# Altium PCB PCB1.PcbDoc
Units mm, origin at the board's own origin, x right, y up, seen from the top; angles counter-clockwise.
Board outline 30.48 x 19.05 mm, 2 copper layers (L1, L2); 9 components, 9 nets, 27 pads, 0 vias.
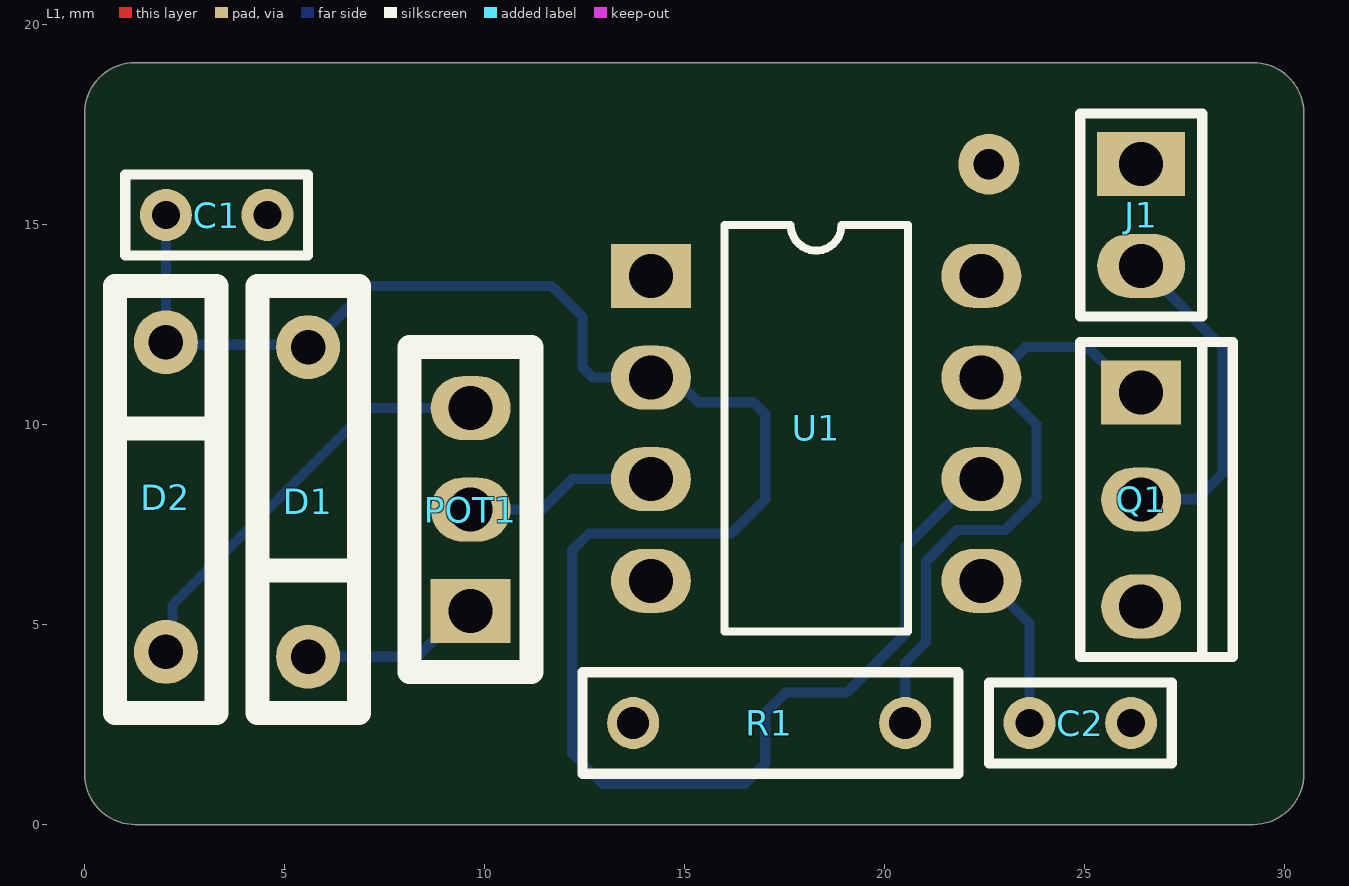
[diagram p0: L1 view]
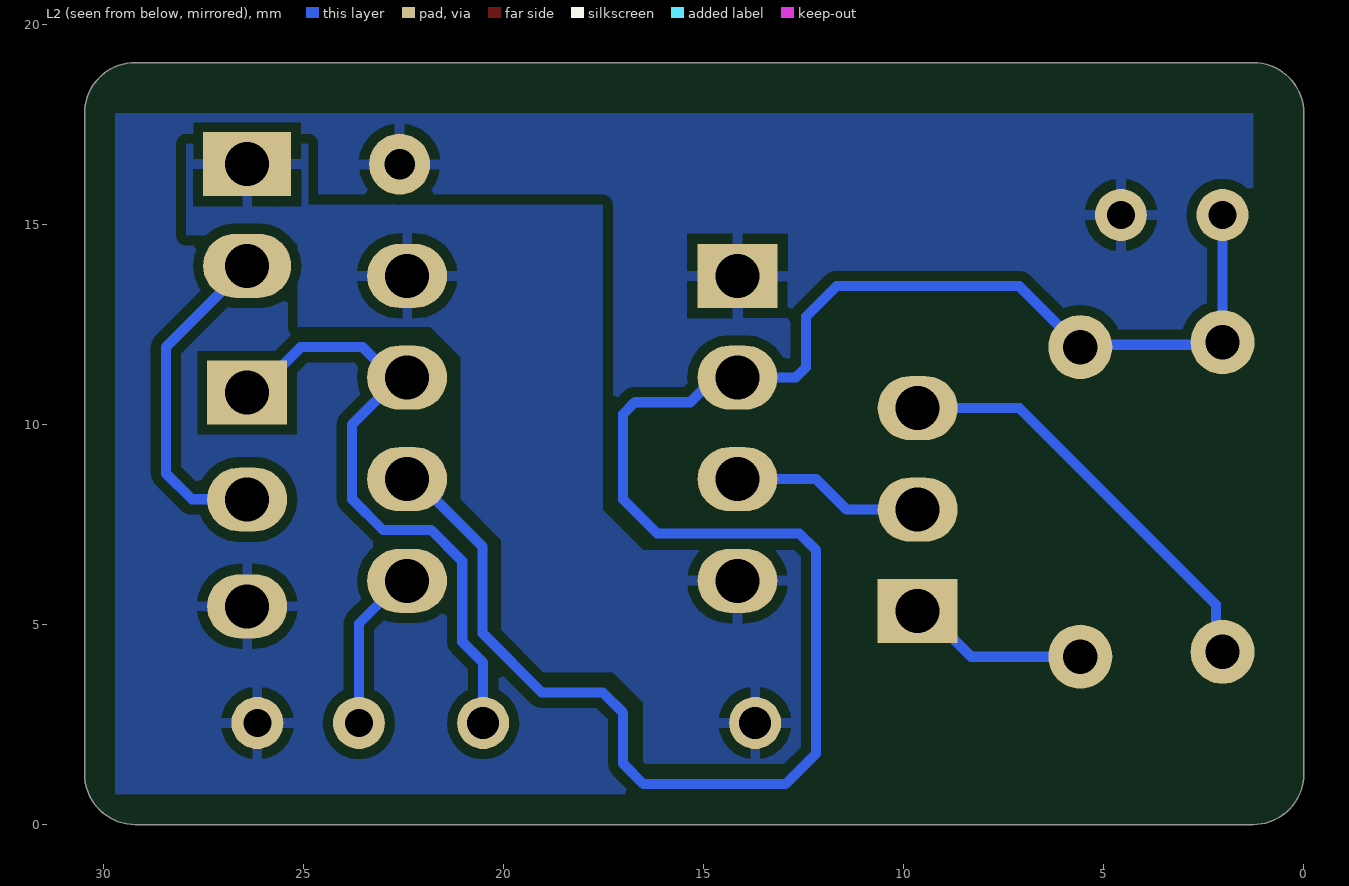
[diagram p1: L2 view, seen from below]

## Layer stack, top to bottom
Top Solder: solder mask 0.0102, Solder Resist, Dk 3.5
L1: signal copper 0.0356
Dielectric 1: dielectric 0.32, FR-4, Dk 4.8
L2: signal copper 0.0356
Bottom Solder: solder mask 0.0102, Solder Resist, Dk 3.5

## Board outline
1.27,19.05 ccw(c1.27,17.78) 0,17.78 0,17.062 0,16.764 0,1.27 ccw(c1.27,1.27) 1.27,0 29.21,0 ccw(c29.21,1.27) 30.48,1.27 30.48,17.78 ccw(c29.21,17.78) 29.21,19.05 28.702,19.05 2.54,19.05 2.322,19.05

## Design rules (kind name [scope] priority, off if disabled: settings)
Clearance [All] p1: gap=0.254 ignorepadtopadclearanceinfootprint=FALSE except(0: Arc-Hole Track-Hole SMDPad-Hole THPad-Hole Via-Hole Fill-Hole Poly-Hole Region-Hole Text-Hole)
PolygonConnect [All] p1: connectstyle=Relief reliefconductorwidth=0.254 reliefentries=4 polygonreliefangle="90 Angle" airgapwidth=0.254
RoutingVias [All] p1: holewidth=0.711 width=1.27 viastyle="Through Hole" minholewidth=0.711 minwidth=1.27 maxholewidth=0.711 maxwidth=1.27
SolderMaskExpansion [All] p1: expansion=0.102 istentingtop=FALSE
Width [All] p1: maxlimit=0.254 minlimit=0.254 preferedwidth=0.254
30 further rules are at their usual default settings.

## Components (designator, comment, footprint, x,y, rotation, side; value= is the part's Value field where it differs from the comment)
C1 "100nF" CAP 4.572,15.24 r180 top
C2 "100PF" CAP 26.162,2.54 r180 top
D1 "1N5819" DIODE1N5819 5.588,11.938 r270 top
D2 "1N5819" DIODE1N5819 2.032,4.318 r90 top
J1 "HDR" HDR1X2 26.416,16.51 r0 top
POT1 "100K" POT 9.652,5.334 r180 top
Q1 "IRF540" TO-220 26.416,10.798 r0 top
R1 "10K" TH_L6.8 13.716,2.54 r0 top
U1 "NE555P" DIP8 18.288,9.906 r0 top

## Footprints (in the part's own frame and the unit in brackets; to place one, negate y for a bottom-side part, rotate by r counter-clockwise, add the part's x,y. Pads: shape width x height; smd on the part's side, far side on the other; paste and mask are expansions set on the pad)
CAP [mm]
  round 1.3 hole 0.7: 1(0,0) 2(2.54,0)
  silkscreen extent -1.02,-1.02 3.56,1.02
DIODE1N5819 [mm]
  round 1.6 hole 0.86: 1(0,0) 2(7.74,0)
  silkscreen extent -1.52,-1.27 9.14,1.27
DIP8 [mm]
  rect 2x1.6 hole 1.1: 1(-4.13,3.81)
  oval 2x1.6 hole 1.1: 2(-4.13,1.27) 3(-4.13,-1.27) 4(-4.13,-3.81) 5(4.13,-3.81) 6(4.13,-1.27) 7(4.13,1.27) 8(4.13,3.81)
  silkscreen extent -2.29,-5.08 2.3,5.08, body extent -3.94,-4.64 3.93,4.63, height 5.84
HDR1X2 [mm]
  rect 2.2x1.6 hole 1.1: 1(0,0)
  oval 2.2x1.6 hole 1.1: 2(0,-2.54)
  silkscreen extent -1.52,-3.81 1.52,1.27
POT [mm]
  rect 2x1.6 hole 1.1: 1(0,0)
  oval 2x1.6 hole 1.1: 2(0,-5.08) 3(0,-2.54)
  silkscreen extent -1.52,-6.6 1.52,1.52
TH_L6.8 [mm]
  round 1.3 hole 0.8: 1(0,0) 2(6.8,0)
  silkscreen extent -1.27,-1.27 8.13,1.27
TO-220 [mm]
  rect 2x1.6 hole 1.1: 1(0,0)
  oval 2x1.6 hole 1.1: 2(0,-2.67) 3(0,-5.34)
  silkscreen extent -1.52,-6.6 2.29,1.27

## Part data
C1: library part RCER71E104K0K1H03B, "Cap Ceramic Monolithic 0.1uF 25VDC 10% Thru-Hole Bulk", Manufacturer=Murata, Supplier Part Number 1=81-RCER71E104K0K1H3B, ComponentLink1Description=http://datasheet.octopart.com/RCER71E104K0K1H03B-Murata-datasheet-138760971.pdf?src-supplier=Ciiva+Crawler, ComponentLink1URL=http://datasheet.octopart.com/RCER71E104K0K1H03B-Murata-datasheet-138760971.pdf?src-supplier=Ciiva+Crawler, ComponentLink2Description=http://datasheet.octopart.com/RCER71E104K0K1H03B-Murata-datasheet-140720004.pdf?src-supplier=Ciiva+Crawler, ComponentLink2URL=http://datasheet.octopart.com/RCER71E104K0K1H03B-Murata-datasheet-140720004.pdf?src-supplier=Ciiva+Crawler, Manufacturer Part Number=RCER71E104K0K1H03B, Pricing 1="1=0.32000, 10=0.15600, 100=0.11100, 500=0.10000, 1000=0.08500, 2500=0.07700 (USD)", Stock 1=894, Supplier 1=Mouser
C2: library part C315C101F3G5TA, Manufacturer=KEMET, Supplier Part Number 1=80-C315C101F3G5TA, Manufacturer Part Number=C315C101F3G5TA, Pricing 1="1=1.10000, 10=0.88000, 50=0.76000, 100=0.66000, 250=0.58000, 500=0.48100 (USD)", RoHS=No, Stock 1=415, Supplier 1=Mouser
D1 D2: "1N58 Series 600 mV 1 A 40 V Max Reverse Voltage Schottky Barrier Rectifier-DO-41", Average Rectified Current=1A, Capacitance=110pF, Forward Voltage=900mV, Manufacturer="ON Semiconductor / Fairchild", Max Forward Surge Current (Ifsm)=25A, Max Operating Temperature=125°C, Max Repetitive Reverse Voltage (Vrrm)=40V, Max Reverse Leakage Current=1mA, Min Operating Temperature=-65°C, Package Quantity=5000, Peak Reverse Current=500uA, Supplier Part Number 1=512-1N5819, Category="Schottky Diodes", ComponentLink1Description=https://datasheet.ciiva.com/4719/1n5817-d-103200-4719059.pdf?src-supplier=Mouser, ComponentLink1URL=https://datasheet.ciiva.com/4719/1n5817-d-103200-4719059.pdf?src-supplier=Mouser, ComponentLink2Description=https://datasheet.ciiva.com/34302/1200637-34302074.pdf?src-supplier=Jameco, ComponentLink2URL=https://datasheet.ciiva.com/34302/1200637-34302074.pdf?src-supplier=Jameco, ComponentLink3Description=https://datasheet.ciiva.com/22651/1671052-22651942.pdf?src-supplier=Element14, ComponentLink3URL=https://datasheet.ciiva.com/22651/1671052-22651942.pdf?src-supplier=Element14, ComponentLink4Description=https://datasheet.ciiva.com/25951/1n5819-25951350.pdf?src-supplier=Avnet+Europe, ComponentLink4URL=https://datasheet.ciiva.com/25951/1n5819-25951350.pdf?src-supplier=Avnet+Europe, ComponentLink5Description=https://datasheet.ciiva.com/8300/1n5819-8300426.pdf?src-supplier=Avnet, ComponentLink5URL=https://datasheet.ciiva.com/8300/1n5819-8300426.pdf?src-supplier=Avnet, ComponentLink6Description=https://datasheet.ciiva.com/1177/1671052-1177084.pdf?src-supplier=Element14, ComponentLink6URL=https://datasheet.ciiva.com/1177/1671052-1177084.pdf?src-supplier=Element14, Contact Plating=Tin,Matte, Current Rating=1A, Diameter=2.72mm, Element Configuration=Single, Forward Current=1A, Height=2.7mm, Lead Free="Lead Free", Length=5.2mm, Manufacturer Part Number=1N5819, Max Reverse Voltage (DC)=40V, Max Surge Current=25A, Mount="Through Hole", Number of Pins=2, Output Current=1A, Packaging="Tape and Reel", Peak Non-Repetitive Surge Current=25A, Polarity=Standard, Pricing 1="1=0.39000, 10=0.26400, 100=0.12300, 1000=0.09600, 5000=0.08300, 10000=0.07400 (USD)", Radiation Hardening=No, REACH SVHC="No SVHC", RoHS=Yes, Stock 1=7162, Supplier 1=Mouser, Voltage Rating (DC)=40V, Weight=0.245g, Width=2.7mm
J1: library part HDR1X2
POT1: library part PDB12-M4251-104BF, "Potentiometers 100K LINEAR 12MM", Manufacturer=Bourns, Max Operating Temperature=50°C, Max Power Dissipation=80mW, Min Operating Temperature=-10°C, Package Quantity=100, Resistance=100kR, Supplier Part Number 1=652-PDB12-M4251104BF, Tolerance=20%, Actuator Diameter=0.236inch, Actuator Length=0.984inch, Category="Variable Resistors and Potentiometers", ComponentLink1Description=https://datasheet.ciiva.com/6249/pdb12-6249595.pdf?src-supplier=Digi-Key, ComponentLink1URL=https://datasheet.ciiva.com/6249/pdb12-6249595.pdf?src-supplier=Digi-Key, Composition=Carbon, Depth=12.8mm, Length=12.8mm, Manufacturer Part Number=PDB12-M4251-104BF, Military Standard=Not, Mount="Through Hole,Brackets", Number of Gangs=1, Number of Turns=1, Packaging=Bulk, Power Rating=80mW, Pricing 1="1=1.01000, 10=0.77000, 100=0.70000, 500=0.59000, 1000=0.55000, 2500=0.48000 (USD)", Radiation Hardening=No, RoHS=Yes, Stock 1=220, Supplier 1=Mouser, Taper=Linear, Termination=Pin, Type=Potentiometer
Q1: "MOSFET N-CH 100V 28A TO-220AB", Case/Package=TO-220-3, Continuous Drain Current (ID)=28A, Drain to Source Breakdown Voltage=100V, Drain to Source Resistance=77mR, Gate to Source Voltage (Vgs)=20V, Input Capacitance=1.7nF, Manufacturer="Vishay Siliconix", Max Operating Temperature=175°C, Max Power Dissipation=150W, Min Operating Temperature=-55°C, Package Quantity=1000, Supplier Part Number 1=844-IRF540, Category=MOSFETs, ComponentLink1Description=https://datasheet.ciiva.com/8114/91021-8114330.pdf?src-supplier=Avnet, ComponentLink1URL=https://datasheet.ciiva.com/8114/91021-8114330.pdf?src-supplier=Avnet, Current=28A, Current Rating=28A, Drain to Source Voltage (Vdss)=100V, Element Configuration=Single, Fall Time=43ns, Height=9.01mm, Lead Free="Contains Lead", Length=10.51mm, Manufacturer Part Number=IRF540, Mount="Through Hole", Number of Channels=1, Number of Elements=1, Number of Pins=3, Packaging=Rail/Tube, Power Dissipation=150W, Rds On Max=77mR, Rise Time=44ns, RoHS=Yes, Supplier 1=Mouser, Turn-Off Delay Time=53ns, Turn-On Delay Time=11ns, Voltage=100V, Voltage Rating (DC)=100V, Weight=0.211644oz, Width=4.7mm
R1: library part CFR-25SJT-52-10K, "Res Carbon Film 10K Ohm 5% 0.25W(1/4W) -500ppm/C to 350ppm/C Conformal Coated AXL Ammo Pack", Case/Package=Conformal, Manufacturer=Yageo, Max Operating Temperature=155°C, Min Operating Temperature=-55°C, Resistance=10kR, Supplier Part Number 1=603-CFR25SJT-52-10K, Temperature Coefficient=350ppm/°C, Tolerance=5%, Category="Through-Hole Resistors", ComponentLink1Description=http://components.arrow.com/part/dataview/0323_00776785?src-supplier=Arrow+Europe, ComponentLink1URL=http://components.arrow.com/part/dataview/0323_00776785?src-supplier=Arrow+Europe, ComponentLink2Description=http://www.yageo.com/documents/recent/Leaded-R_CFR_2011.pdf?src-supplier=Avnet+Europe, ComponentLink2URL=http://www.yageo.com/documents/recent/Leaded-R_CFR_2011.pdf?src-supplier=Avnet+Europe, ComponentLink3Description=http://www.yageo.com/documents/recent/Yageo%20LR_CFR_2013.pdf?src-supplier=Avnet, ComponentLink3URL=http://www.yageo.com/documents/recent/Yageo%20LR_CFR_2013.pdf?src-supplier=Avnet, ComponentLink4Description=http://www.yageo.com/documents/recent/Leaded-R_CFR_2011.pdf?src-supplier=Avnet, ComponentLink4URL=http://www.yageo.com/documents/recent/Leaded-R_CFR_2011.pdf?src-supplier=Avnet, Composition="Carbon Film", Contact Plating=Tin,Matte, Diameter=2.4mm, Length=6.3mm, Manufacturer Part Number=CFR-25SJT-52-10K, Military Standard=Not, Mount="Through Hole", Packaging="Ammo Pack", Pricing 1="1=0.10000, 10=0.04300, 100=0.01500, 1000=0.01100, 5000=0.00800, 10000=0.00700 (USD)", Radiation Hardening=No, RoHS=Yes, Stock 1=2722, Supplier 1=Mouser, Termination=Axial
U1: "Standard Timer Single 8-Pin PDIP Tube", Case/Package=PDIP, Current Rating=10mA, Frequency=500kHz, High Level Output Current=-200mA, Low Level Output Current=200mA, Manufacturer="Texas Instruments", Max Operating Temperature=70°C, Max Supply Voltage=16V, Min Operating Temperature=0°C, Min Supply Voltage=4.5V, Nominal Supply Current=2mA, Operating Supply Voltage=5V, Package Quantity=50, Quiescent Current=15mA, Supplier Part Number 1=296-NE555P-ND, Category="Clock and Timing", ComponentLink1Description=https://datasheet.ciiva.com/1139/sa555-1139904.pdf?src-supplier=Element14, ComponentLink1URL=https://datasheet.ciiva.com/1139/sa555-1139904.pdf?src-supplier=Element14, ComponentLink2Description=https://datasheet.ciiva.com/19457/904085-19457361.pdf?src-supplier=Jameco, ComponentLink2URL=https://datasheet.ciiva.com/19457/904085-19457361.pdf?src-supplier=Jameco, ComponentLink3Description=https://datasheet.ciiva.com/26325/152184-da-01-en-ne555p-timer-tid-26325915.pdf?src-supplier=Conrad, ComponentLink3URL=https://datasheet.ciiva.com/26325/152184-da-01-en-ne555p-timer-tid-26325915.pdf?src-supplier=Conrad, ComponentLink4Description=https://datasheet.ciiva.com/1147/1764032-1147750.pdf?src-supplier=Newark, ComponentLink4URL=https://datasheet.ciiva.com/1147/1764032-1147750.pdf?src-supplier=Newark, ComponentLink5Description=https://datasheet.ciiva.com/14094/ne555-series-eng-tds-14094950.pdf?src-supplier=Distrelec, ComponentLink5URL=https://datasheet.ciiva.com/14094/ne555-series-eng-tds-14094950.pdf?src-supplier=Distrelec, ComponentLink6Description=https://datasheet.ciiva.com/14274/ne555-14274456.pdf?src-supplier=Avnet, ComponentLink6URL=https://datasheet.ciiva.com/14274/ne555-14274456.pdf?src-supplier=Avnet, ComponentLink7Description=https://datasheet.ciiva.com/15152/getdatasheetpartid-248510-15152620.pdf?src-supplier=Verical, ComponentLink7URL=https://datasheet.ciiva.com/15152/getdatasheetpartid-248510-15152620.pdf?src-supplier=Verical, ComponentLink8Description=https://datasheet.ciiva.com/26228/ne555-26228892.pdf?src-supplier=Avnet+Europe, ComponentLink8URL=https://datasheet.ciiva.com/26228/ne555-26228892.pdf?src-supplier=Avnet+Europe, ComponentLink9Description=https://datasheet.ciiva.com/1233/ne555-1233454.pdf?src-supplier=Digi-Key, ComponentLink9URL=https://datasheet.ciiva.com/1233/ne555-1233454.pdf?src-supplier=Digi-Key, Contact Plating=Gold, Height=4.57mm, Lead Free="Lead Free", Length=9.81mm, Manufacturer Part Number=NE555P, Mount="Through Hole", Number of Pins=8, Number of Timers/Counters=1, Operating Supply Current=10mA, Packaging=Rail/Tube, Pricing 1="1=0.45000, 10=0.34200, 25=0.30800, 100=0.21280, 250=0.17920, 500=0.14560, 1000=0.11200, 2500=0.10080, 5000=0.09520 (USD)", Radiation Hardening=No, REACH SVHC="No SVHC", RoHS=Yes, Stock 1=20716, Supplier 1=Digi-Key, Weight=0.015535oz, Width=6.35mm

## Free pads (board coordinates)
  round 1.524 hole 0.762: 1(22.606,16.51)

## Nets (pads, with @x,y where several pads share a name; then routed paths per layer and width w, separated by ;. In a path a pad name is that pad's centre, name@x,y a point inside that pad or via, vN(x,y) a via of type N, cw(c..) or ccw(c..) an arc to the next point about the centre after c; other vN are vias at no path point)
+12: J1.1 R1.1 U1.4 U1.8 | length 1.6
  L2 w0.254: R1.1 R1.1@13.716,2.823 ; U1.8@22.218,13.716 U1.8 U1.8@22.618,13.716 ; J1.1@25.743,15.837 J1.1
GND: C1.1 C2.1 pad.1 Q1.3 U1.1 | length 1.9
  L2 w0.254: U1.1@13.958,13.716 U1.1 14.313,13.716 U1.1@14.986,14.389 ; C2.1 C2.1@26.289,2.667 ; Q1.3@26.289,5.331 Q1.3 Q1.3@26.616,5.458
NetC1_2: C1.2 D1.1 D2.2 U1.2 U1.6 | length 49.2
  L2 w0.254: C1.2 D2.2 2.092,11.998 5.528,11.998 D1.1 7.112,13.462 11.684,13.462 12.446,12.7 12.446,11.43 12.7,11.176 U1.2 14.722,11.176 15.339,10.559 16.724,10.559 17.018,10.265 17.018,8.128 16.167,7.277 12.611,7.277 12.192,6.858 12.192,1.778 12.954,1.016 16.51,1.016 17.018,1.524 17.018,2.794 17.526,3.302 19.05,3.302 20.529,4.781 20.529,6.947 22.218,8.636 U1.6
NetC2_2: C2.2 U1.5 | length 4.1
  L2 w0.254: U1.5 22.556,6.096 23.622,5.03 C2.2
NetD1_2: D1.2 POT1.1 | length 4.5
  L2 w0.254: D1.2 8.316,4.198 9.452,5.334 POT1.1
NetD2_1: D2.1 POT1.2 | length 10.7
  L2 w0.254: D2.1 2.197,4.483 2.197,5.499 7.112,10.414 POT1.2
NetJ1_2: J1.2 Q1.2 | length 8.3
  L2 w0.254: Q1.2 26.422,8.134 27.797,8.134 28.448,8.785 28.448,11.938 J1.2
NetPOT1_3: POT1.3 U1.3 | length 4.8
  L2 w0.254: POT1.3 11.43,7.874 12.192,8.636 U1.3
NetQ1_1: Q1.1 R1.2 U1.7 | length 16
  L2 w0.254: R1.2 20.516,4.05 21.037,4.571 21.037,6.585 21.818,7.366 23.018,7.366 23.799,8.147 23.799,9.995 U1.7@22.618,11.176 ; U1.7 U1.7@22.618,11.176 ; Q1.1 26.216,10.798 25.076,11.938 23.526,11.938 22.764,11.176 U1.7@22.618,11.176

## Polygon pours and split planes (outlines as drawn)
GND on L2 "GND_L02_P001" (solid, remove dead copper, pour order 1): 1.27,17.78 1.27,0.762 29.718,0.762 29.718,17.78
+12 on L2 "+12_L02_P000" (solid, remove dead copper, pour order 0): 12.954,1.524 12.446,2.032 12.446,6.604 12.7,6.858 16.51,6.858 17.526,7.874 17.526,15.494 24.892,15.494 24.892,17.018 27.94,17.018 27.94,14.732 25.4,14.732 25.146,14.478 25.146,12.446 21.844,12.446 21.082,11.684 21.082,8.128 20.066,7.112 20.066,4.826 19.05,3.81 17.272,3.81 16.51,3.048 16.51,1.524